# EAGLE board QuadcopterLayout (EAGLE 9.7.0)
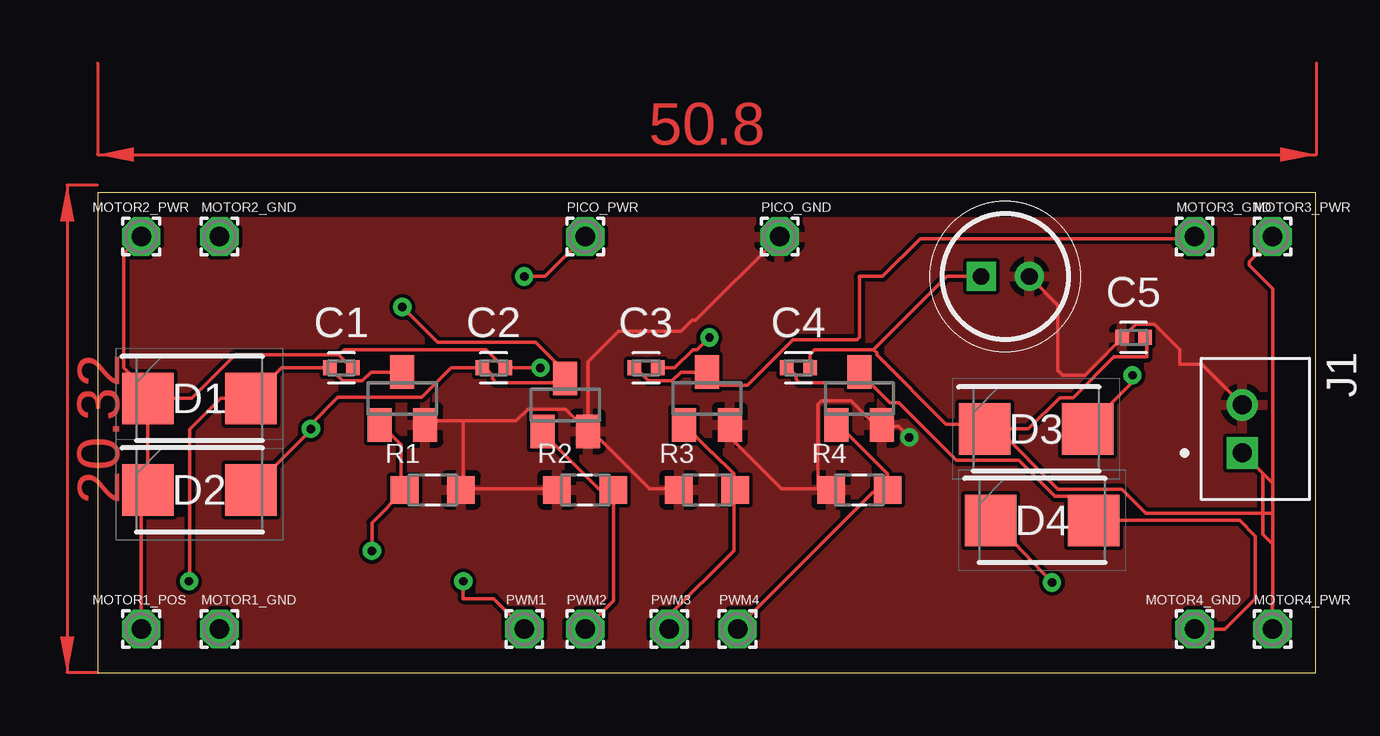
[diagram p0: board, top side]
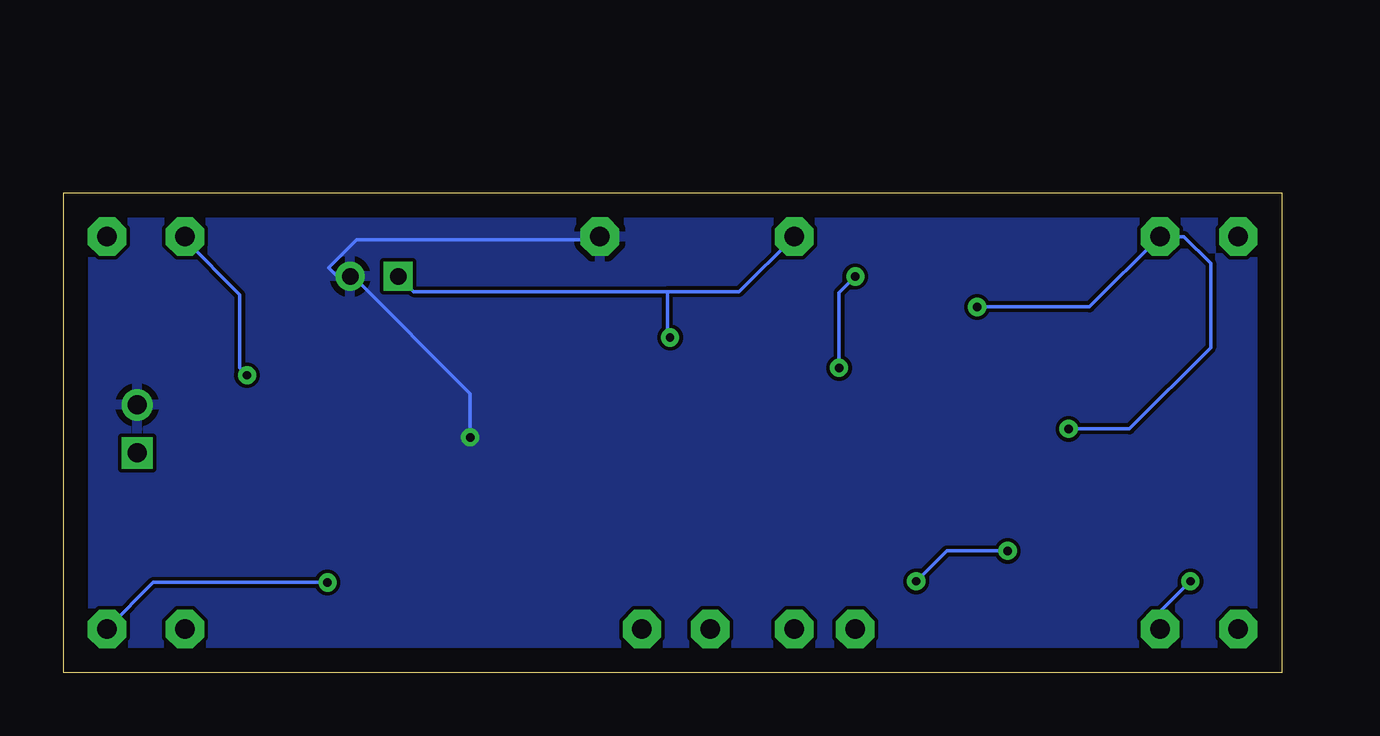
[diagram p1: board, bottom side, seen from below]

Size 50.78 x 19.99 mm. Coordinates in mm from the lower left corner, seen from the top.
Outline: 0,0 50.78,0 50.78,19.99 0,19.99 0,0
Copper layers (1*16): Top 0.035mm / dielectric 1.5mm / Bottom 0.035mm
Design rules "Fusion Electronics Design Rules": minimum track width 6mil, minimum drill 0.35mm, track to track 6mil, track to pad 6mil, pad to pad 6mil, via to via 6mil, smd to smd 6mil, copper to edge 40mil, drill to drill 6mil, minimum pad ring 10mil, minimum via ring 8mil, stop-mask expansion 4mil, vias tented up to drill 0mil, thermal gap 10mil

## Footprints (pad centres in the part's own frame; a part is rotated, then mirrored left to right if it is on the bottom)
CAPC1005X60 = smd 0.56 x 0.629: 1 -0.485,0; 2 0.485,0
CAPPRD200W50D525H1250 = drill 0.7 pad 1.1 square: 1 0,0 | drill 0.7 pad 1.1: 2 2,0
DIOM5235X244N = smd 2.15 x 2.15: 1 -2.15,0; 2 2.15,0
JST_B2B-PH-K-S = drill 0.8 square: 1 1,-0.55 | drill 0.8: 2 -1,-0.55
1,6/0,8 = drill 0.813 pad 1.6 octagon: 1 0,0
SOT23 = smd 1 x 1.4: 1 -0.95,-1.1; 2 0.95,-1.1; 3 0,1.1
RES_ERJ-6GEYJ103V = smd 1.15 x 1.15: 1 -1.175,0; 2 1.175,0

## Placement (x,y rotation side)
C1  [CAPC1005X60]  10.16,12.7 0 top
C2  [CAPC1005X60]  16.51,12.7 0 top
C3  [CAPC1005X60]  22.86,12.7 0 top
C4  [CAPC1005X60]  29.21,12.7 0 top
C5  [CAPC1005X60]  43.18,13.97 0 top
C6  REA010M2CBK-0511P  [CAPPRD200W50D525H1250]  36.83,16.51 0 top
D1  SS54B-HF  [DIOM5235X244N]  4.24,11.43 0 top
D2  SS54B-HF  [DIOM5235X244N]  4.24,7.62 0 top
D3  SS54B-HF  [DIOM5235X244N]  39.12,10.16 0 top
D4  SS54B-HF  [DIOM5235X244N]  39.37,6.35 0 top
J1  B2B-PH-K-S  [JST_B2B-PH-K-S]  48.26,10.16 270 top
MOTOR1_GND  [1,6/0,8]  5.08,1.82 0 top
MOTOR1_POS  [1,6/0,8]  1.82,1.82 0 top
MOTOR2_GND  [1,6/0,8]  5.08,18.17 0 top
MOTOR2_PWR  [1,6/0,8]  1.82,18.17 0 top
MOTOR3_GND  [1,6/0,8]  45.72,18.17 0 top
MOTOR3_PWR  [1,6/0,8]  48.96,18.17 0 top
MOTOR4_GND  [1,6/0,8]  45.72,1.82 0 top
MOTOR4_PWR  [1,6/0,8]  48.96,1.82 0 top
PICO_GND  [1,6/0,8]  28.42,18.17 0 top
PICO_PWR  [1,6/0,8]  20.32,18.17 0 top
PWM1  [1,6/0,8]  17.78,1.82 0 top
PWM2  [1,6/0,8]  20.32,1.82 0 top
PWM3  [1,6/0,8]  23.83,1.82 0 top
PWM4  [1,6/0,8]  26.67,1.82 0 top
Q1  NMOSFET  [SOT23]  12.7,11.43 0 top
Q2  NMOSFET  [SOT23]  19.49,11.15 0 top
Q3  NMOSFET  [SOT23]  25.4,11.43 0 top
Q4  NMOSFET  [SOT23]  31.75,11.43 0 top
R1  ERJ-6GEYJ103V  [RES_ERJ-6GEYJ103V]  13.97,7.62 0 top
R2  ERJ-6GEYJ103V  [RES_ERJ-6GEYJ103V]  20.32,7.62 0 top
R3  ERJ-6GEYJ103V  [RES_ERJ-6GEYJ103V]  25.4,7.62 0 top
R4  ERJ-6GEYJ103V  [RES_ERJ-6GEYJ103V]  31.75,7.62 0 top

## Library data of the parts
C1-C5 = Tinkercad; CATEGORY: Capacitor
C6 = REA010M2CBK-0511P; DESCRIPTION: Aluminum Electrolytic Capacitors - Radial Leaded 160V 1.0uF 20% 5x11mm; HEIGHT: 12.5mm; MANUFACTURER_NAME: Lelon; MANUFACTURER_PART_NUMBER: REA010M2CBK-0511P; MOUSER_PART_NUMBER: 140-REA1R0M2CBK0511P; MOUSER_PRICE-STOCK: https://www.mouser.co.uk/ProductDetail/Lelon/REA010M2CBK-0511P?qs=tsfqLUzc7IoVZpITlkTcwQ%3D%3D
D1-D4 = SS54B-HF; DESCRIPTION: Schottky Diodes & Rectifiers DIODE SCHOTTKY 5A 40V SMB; HEIGHT: 2.44mm; MANUFACTURER_NAME: Comchip Technology; MANUFACTURER_PART_NUMBER: SS54B-HF; MOUSER_PART_NUMBER: 750-SS54B-HF; MOUSER_PRICE-STOCK: https://www.mouser.co.uk/ProductDetail/Comchip-Technology/SS54B-HF?qs=GBLSl2AkirtlOFqvTyWKug%3D%3D
J1 = B2B-PH-K-S; MANUFACTURER: JST
MOTOR1_GND MOTOR1_POS MOTOR2_GND MOTOR2_PWR MOTOR3_GND MOTOR3_PWR MOTOR4_GND MOTOR4_PWR PICO_GND PICO_PWR PWM1-PWM4 = wirepad
Q1 = Tinkercad; CATEGORY: Transistor; SUB-CATEGORY: MOSFET; TYPE: N-Channel
Q2-Q4 = Transistor; CATEGORY: Transistor; SUB-CATEGORY: MOSFET; TYPE: N-Channel
R1-R4 = ERJ-6GEYJ103V; MANUFACTURER: Panasonic; MAXIMUM_PACKAGE_HEIGHT: 0.55 mm; PARTREV: 3/1/2020; STANDARD: Manufacturer Recommendations

## Nets
+V: C1.2 C2.2 C3.2 C4.2 C5.2 C6.1 D1.1 D2.1 D3.1 D4.1 J1.1 MOTOR1_POS.1 MOTOR2_PWR.1 MOTOR3_PWR.1 MOTOR4_PWR.1 PICO_PWR.1
GND: C5.1 C6.2 J1.2 PICO_GND.1 Q1.2 Q2.2 Q3.2 Q4.2 R1.2 R2.1 R3.1 R4.1
N$1: C1.1 D1.2 MOTOR1_GND.1 Q1.3
N$2: PWM2.1 Q2.1 R2.2
N$3: PWM1.1 Q1.1 R1.1
N$4: C3.1 D3.2 MOTOR3_GND.1 Q3.3
N$5: C2.1 D2.2 MOTOR2_GND.1 Q2.3
N$6: PWM4.1 Q4.1 R4.2
N$8: C4.1 D4.2 MOTOR4_GND.1 Q4.3
N$12: PWM3.1 Q3.1 R3.2

## Tracks (layer width: path | path; a pad name or v marks a point on that pad's centre or on a via)
+V  (via drill 0.35)
  Top 0.152: 48.98,5.35 48.98,2.81 48.96,2.79 MOTOR4_PWR.1 | MOTOR2_PWR.1 1.09,17.45 1.09,12.7 2.09,11.7 D1.1 | 48.98,5.35 48.98,16 48.01,16.97 48.01,17.12 48.92,18.03 MOTOR3_PWR.1 | D1.1 3.92,11.43 5.73,13.24 10.05,13.24 | C5.2 43.74,13.92 43.74,13.16 42.37,13.16 40.67,11.46 40.1,11.46 38.79,10.16 37.52,10.16 | v39.78,3.76 37.4,6.27 D4.1 | MOTOR1_POS.1 1.82,7.34 D2.1 D1.1 | C4.2 29.7,13.27 29.89,13.46 32.34,13.46 | 48.98,5.35 48.56,5.77 48.56,8.31 J1.1 48.98,7.89 48.98,6.66 43.69,6.66 42.69,7.65 40.03,7.65 37.52,10.16 | 37.52,10.16 D3.1 36.88,10.26 36.78,10.36 35.36,10.36 32.48,13.24 32.48,13.33 32.34,13.46 | C6.1 35.4,16.51 32.34,13.46 | v25.5,13.97 24.99,13.46 24.8,13.46 24.05,12.7 C3.2 | PICO_PWR.1 18.66,16.51 v17.78,16.51 | v18.46,12.7 C2.2 16.94,12.7 16.18,13.46 10.27,13.46 10.05,13.24 | C1.2 10.59,12.7 10.05,13.24
  Bottom 0.152: PICO_PWR.1 22.62,15.88 25.6,15.88 | C6.1 36.2,15.88 25.6,15.88 | MOTOR4_PWR.1 48.92,1.88 47.04,3.76 v39.78,3.76 | 25.6,15.88 25.6,14.07 v25.5,13.97 | v17.78,16.51 18.46,15.83 v18.46,12.7
GND  (via drill 0.35)
  Top 0.152: Q2.2 19.51,10.98 17.94,10.98 17.45,10.49 15.24,10.49 | C6.2 40.03,15.31 40.03,12.58 40.08,12.55 40.23,12.4 41.15,12.4 42.67,13.92 C5.1 42.82,14.07 43.28,14.53 44.04,14.53 45.11,13.46 45.11,12.85 46.02,12.85 J1.2 | 15.24,10.49 13.81,10.49 Q1.2 | Q2.2 20.44,12.95 21.71,14.22 24.31,14.22 24.76,14.68 24.93,14.68 PICO_GND.1 | 30.02,7.67 28.5,7.67 26.36,9.8 26.36,10.26 Q3.2 | 30.02,7.67 30.48,7.67 R4.1 30.02,7.67 | 30.02,7.67 30.02,11.18 30.18,11.33 31.39,11.33 32.31,10.41 32.61,10.41 Q4.2 32.77,10.26 33.38,10.26 v33.83,9.8 | 15.24,10.49 15.24,7.67 | 15.24,7.67 19.05,7.67 R2.1 | 15.24,7.67 R1.2 | R3.1 24.08,7.67 23.01,7.67 20.57,10.11 Q2.2
  Bottom 0.152: PICO_GND.1 28.5,18.03 38.56,18.03 39.73,16.87 39.37,16.51 C6.2 38.71,16.51 33.83,11.63 v33.83,9.8
  pour Top: -3.61,-2.34 54.41,-2.34 54.41,25.2 -3.61,25.2
  pour Bottom: -3.61,-2.34 54.41,-2.34 54.41,25.2 -3.61,25.2
N$1  (via drill 0.35)
  Top 0.152: Q1.3 11.39,12.53 11.02,12.16 10.22,12.16 C1.1 7.66,12.7 D1.2 5.12,11.43 3.83,10.14 3.83,3.83 v3.81,3.81
  Bottom 0.152: v3.81,3.81 5.08,2.54 MOTOR1_GND.1
N$2
  Top 0.152: Q2.1 18.59,9.96 20.88,7.67 21.49,7.67 21.49,7.63 R2.2 21.5,2.99 PWM2.1
N$3  (via drill 0.35)
  Top 0.152: Q1.1 11.89,10.26 12.65,9.5 12.65,7.67 R1.1 11.43,6.26 v11.43,5.08 | PWM1.1 16.51,3.09 15.24,3.09 v15.24,3.81
  Bottom 0.152: v15.24,3.81 13.97,5.08 v11.43,5.08
N$4  (via drill 0.35)
  Top 0.152: MOTOR3_GND.1 45.63,18.09 34.29,18.09 32.72,16.51 31.75,16.51 31.75,13.97 31.65,13.87 28.98,13.87 27.08,11.97 25.96,11.97 Q3.3 24.31,12.53 23.93,12.16 22.97,12.16 22.43,12.7 C3.1 | D3.2 41.27,10.23 43.13,12.09 v43.13,12.4
  Bottom 0.152: MOTOR3_GND.1 45.72,18.03 43.43,15.75 43.43,12.7 v43.13,12.4
N$5  (via drill 0.35)
  Top 0.152: 19.36,12.24 19.2,12.09 16.61,12.09 16.46,12.24 16.46,12.4 16.15,12.7 C2.1 14.73,12.7 13.51,11.48 10.01,11.48 8.89,10.36 v8.89,10.16 8.89,10.12 D2.2 | 19.36,12.24 Q2.3 | 19.36,12.24 19.36,12.66 18.25,13.76 14.18,13.76 v12.7,15.24
  Bottom 0.152: v8.89,10.16 6.35,10.16 2.97,13.54 2.97,17.07 4.08,18.17 MOTOR2_GND.1 8.01,15.24 v12.7,15.24
N$6
  Top 0.152: Q4.1 30.94,10.26 32.92,8.28 32.92,7.67 R4.2 32.92,7.52 32.31,7.52 26.67,1.88 PWM4.1
N$8
  Top 0.152: C4.1 28.8,12.7 29.11,12.4 29.11,12.24 29.26,12.09 31.39,12.09 31.7,12.4 Q4.3 33.02,11.26 33.4,11.26 35.8,8.86 38.4,8.86 39.9,7.35 40.52,7.35 D4.2 47.6,6.35 48.26,5.69 48.26,3.09 46.99,1.82 MOTOR4_GND.1
N$12
  Top 0.152: Q3.1 25.59,9.19 25.6,9.2 26.52,8.28 26.52,7.67 R3.2 26.52,7.52 26.52,5.08 23.82,2.39 PWM3.1
(copper drawn outside any net)
  shapes: Top area x2